# Altium PCB Main.PcbDoc
Units mm, origin at the board's own origin, x right, y up, seen from the top; angles counter-clockwise.
Board outline 35 x 45 mm, 2 copper layers (Top Layer, Bottom Layer), stack 1.135 mm thick; 2 components, 2 nets, 4 pads, 0 vias.
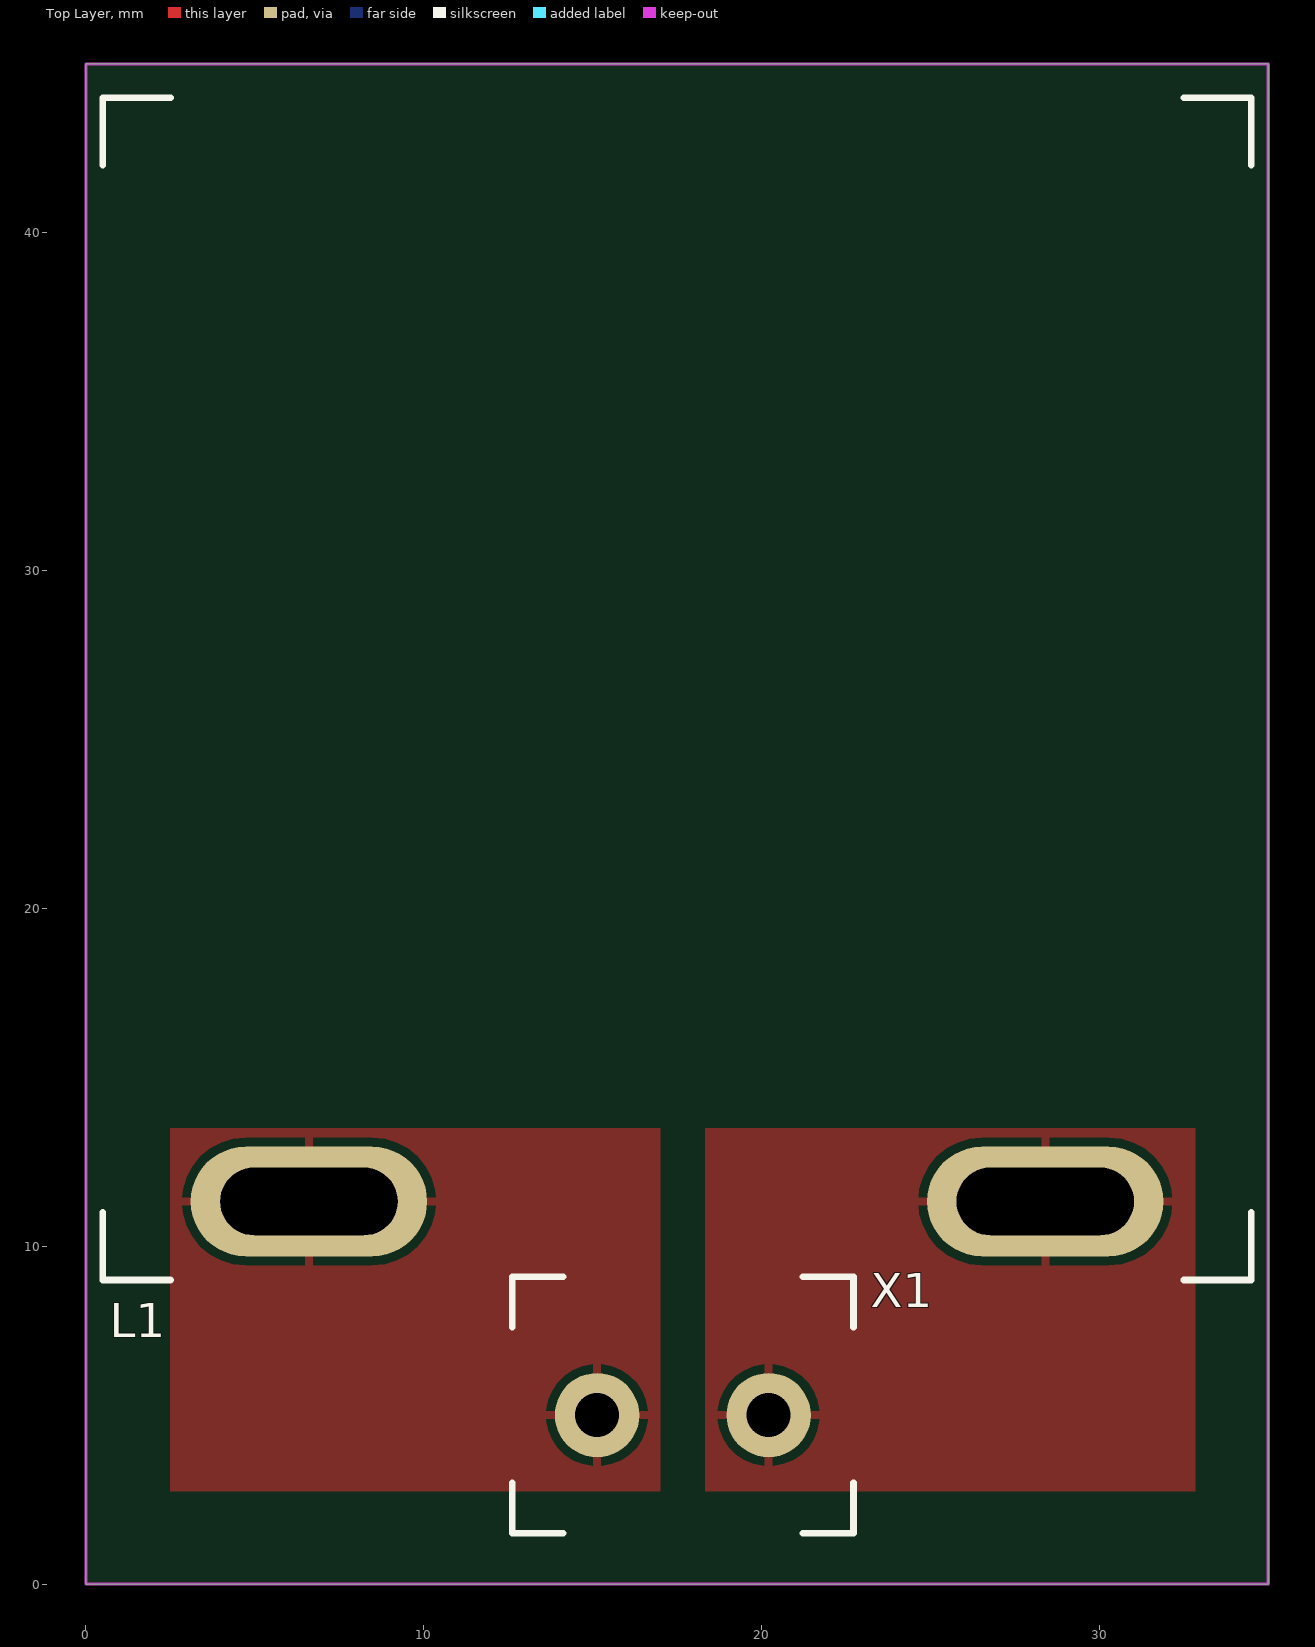
[diagram p0: Top Layer view]
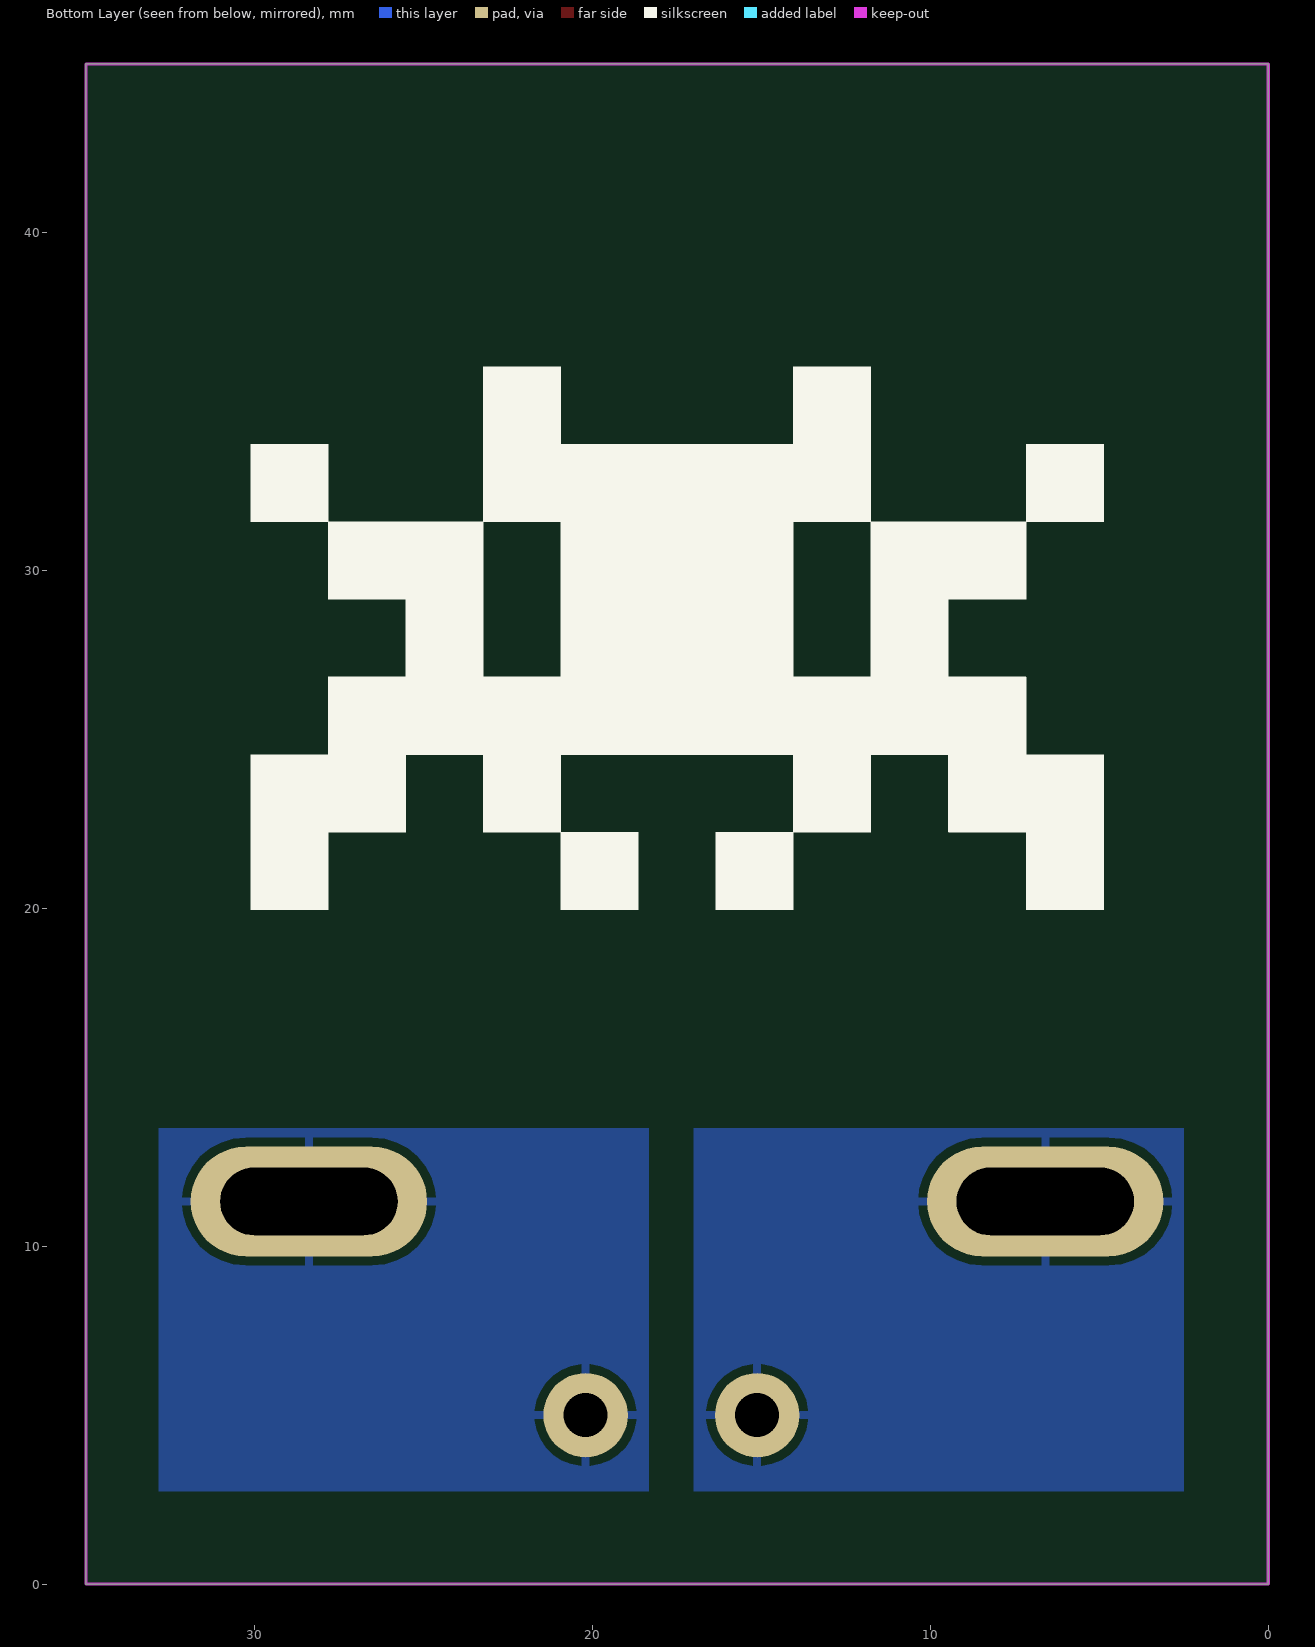
[diagram p1: Bottom Layer view, seen from below]

## Layer stack, top to bottom
Top Solder: solder mask 0.0102, Solder Resist, Dk 3.8
Top Layer: signal copper 0.035
Dielectric 1: dielectric 1.065, FR-4, Dk 4.8
Bottom Layer: signal copper 0.035
Bottom Solder: solder mask 0.0102, Solder Resist, Dk 3.8

## Board outline
0,0 35,0 35,45 0,45

## Design rules (kind name [scope] priority, off if disabled: settings)
BoardOutlineClearance [All] p1: gap=0.2 ignorepadtopadclearanceinfootprint=FALSE
Clearance "inPolygon Clearance" [InPolygon] p1: gap=0.3 ignorepadtopadclearanceinfootprint=TRUE // this rule ensures that every net within a polygon of a different net has a set clearance from the poly
Clearance "Different Diff Pair" [All] p2: gap=0.2 ignorepadtopadclearanceinfootprint=TRUE
Clearance "Same Diff Pair" [All] p3: gap=0.1 ignorepadtopadclearanceinfootprint=TRUE
Clearance "Different Nets" [not InAnyDifferentialPair] p4: gap=0.3 ignorepadtopadclearanceinfootprint=TRUE except(0.1: Arc-SMDPad Arc-THPad Arc-Via Arc-Text Track-SMDPad Track-THPad Track-Via Track-Text SMDPad-Text THPad-Text Via-Text Fill-Text Poly-Text Region-Text Text-Text; 0.12: Arc-Arc Arc-Track Track-Track; 0.15: SMDPad-SMDPad SMDPad-THPad SMDPad-Via THPad-THPad THPad-Via Via-Via; 0.2: Arc-Hole Track-Hole SMDPad-Hole THPad-Hole Via-Hole Fill-Hole Poly-Hole Region-Hole Text-Hole)
Clearance "Same Net" [not InAnyDifferentialPair] p5: gap=0 ignorepadtopadclearanceinfootprint=TRUE except(0.1: THPad-Via; 0.18: Arc-Arc Arc-Track Track-Track)
ComponentClearance [All] p1: gap=0.102 collisioncheckmode=3 verticalgap=0.102 showdistances=TRUE
DiffPairsRouting "Ethernet Routing" [InDifferentialPairClass('Ethernet_Pairs')] p1: maxlimit=0.2 minlimit=0.2 mostfreqgap=0.2 toplayer_minwidth=0.25 toplayer_maxwidth=0.25 toplayer_prefwidth=0.25 bottomlayer_minwidth=0.25 bottomlayer_maxwidth=0.25 bottomlayer_prefwidth=0.25 impedanceprofiledriven=TRUE maxuncoupledlength=12.7
DiffPairsRouting "USB Routing" [InDifferentialPairClass('USB_Pairs')] p2: maxlimit=0.127 minlimit=0.127 mostfreqgap=0.127 toplayer_minwidth=0.23 toplayer_maxwidth=0.23 toplayer_prefwidth=0.23 bottomlayer_minwidth=0.23 bottomlayer_maxwidth=0.23 bottomlayer_prefwidth=0.23 impedanceprofiledriven=TRUE maxuncoupledlength=12.7
DiffPairsRouting "CAN Routing" [InDifferentialPairClass('CAN_Pairs')] p3: maxlimit=0.5 minlimit=0.5 mostfreqgap=0.5 toplayer_minwidth=0.201 toplayer_maxwidth=0.201 toplayer_prefwidth=0.201 bottomlayer_minwidth=0.201 bottomlayer_maxwidth=0.201 bottomlayer_prefwidth=0.201 impedanceprofiledriven=TRUE maxuncoupledlength=12.7
Height [All] p1: minheight=0 maxheight=1816.048 prefheight=12.7
HoleSize [All] p1: absolutevalues=TRUE maxlimit=20 minlimit=0.3 maxpercent=80.000 minpercent=20.000
HoleToHoleClearance [All] p1: gap=0.25 allowstackedmicrovias=FALSE
Length [All] p1: maxlimit=43.432 minlimit=0 usedelayunits=TRUE mindelay=0.000000 maxdelay=10000.000000
MatchedLengths "Diff Pair Matched Delays" [InDifferentialPairClass('Ethernet_Pairs') or InDifferentialPairClass('USB_Pairs') or InDifferentialPairClass('CAN_Pairs')] p1: tolerance=5 checknetsindiffpair=TRUE checkdiffpairvsdiffpair=FALSE checkxsignals=FALSE checkothers=FALSE usedelayunits=TRUE delaytolerance=100.000000
MinimumAnnularRing [All] p1: minimumring=0.2
MinimumSolderMaskSliver [All] p1: minsoldermaskwidth=0
PlaneClearance "Supply Net Clearance" [InNetClass('Supply_Nets')] p1: clearance=0.5
PlaneClearance "All Nets" [All] p2: clearance=0.3
PolygonConnect "Supply Nets" [InNetClass('Supply_Nets')] p1: thpad.connectstyle=Relief thpad.reliefconductorwidth=0.3 thpad.reliefentries=4 thpad.polygonreliefangle="90 Angle" thpad.airgapwidth=0.254 thpad.conductorbypadedge=TRUE thpad.mindistance=0.381 thpad.enablemindistance=FALSE smdpad.connectstyle=Relief smdpad.reliefconductorwidth=0.3 smdpad.reliefentries=4 smdpad.polygonreliefangle="90 Angle" smdpad.airgapwidth=0.254 smdpad.conductorbypadedge=TRUE smdpad.mindistance=0.381 smdpad.enablemindistance=FALSE via.connectstyle=Direct via.reliefconductorwidth=0.3 via.reliefentries=4 via.polygonreliefangle="90 Angle" via.airgapwidth=0.254
PolygonConnect General [All] p2: connectstyle=Relief reliefconductorwidth=0.254 reliefentries=4 polygonreliefangle="90 Angle" airgapwidth=0.254
RoutingVias [All] p1: holewidth=0.2 width=0.35 viastyle="Through Hole" minholewidth=0.15 minwidth=0.3 maxholewidth=6.3 maxwidth=6.55
SilkToSilkClearance [All] p1: silktosilkclearance=0
SilkToSolderMaskClearance [All] p1: minsilkscreentomaskgap=0 clearancetoexposedcopper=TRUE
SolderMaskExpansion [All] p1: expansion=0.075 istentingtop=FALSE
UnRoutedNet [All] p1: checkbadconnections=TRUE
Width "nRF Width" [InNetClass('nRF Signal')] p1: maxlimit=0.379 minlimit=0.379 preferedwidth=0.379 impedanceprofiledriven=TRUE minimp=50.000000 maximp=50.000000 favimp=50.000000 checkconnectedcopper=TRUE
Width [All] p2: maxlimit=100 minlimit=0.1 preferedwidth=0.3
20 further rules are at their usual default settings.

## Components (designator, comment, footprint, x,y, rotation, side; value= is the part's Value field where it differs from the comment)
L1 "[6.8uH] Thru-Hole 47.5A 1.2mOhm" "[6.8uH] Thru-Hole 47.5A 1.2mOhm" 17.5,29 r0 top
X1 "2pin Screw Terminal" "[Screw Terminal] 2pin 5mm" 17.63,5 r0 top

## Footprints (in the part's own frame and the unit in brackets; to place one, negate y for a bottom-side part, rotate by r counter-clockwise, add the part's x,y. Pads: shape width x height; smd on the part's side, far side on the other; paste and mask are expansions set on the pad)
"[6.8uH] Thru-Hole 47.5A 1.2mOhm" [mm]
  oval 7x3.25 hole 2 slot 5.25 at 0 deg: 1(-10.9,-17.675) 2(10.9,-17.675)
  silkscreen extent -17,-20 17,15, body extent -16.5,-18.35 16.5,14.65, height 15.5
"[Screw Terminal] 2pin 5mm" [mm]
  round 2.5 hole 1.3: 1(-2.5,0) 2(2.58,0)
  silkscreen extent -5.01,-3.5 5.09,4.1, body extent -5.45,-3.5 5.05,4.1, height 9.99

## Part data
L1: "B82559A5682A033", Inductance=6.8uH, Package=Thru-Hole, Supplier Part Number 1=495-B82559A5682A033-ND, Supplier 1=DigiKey
X1: library part "[Screw Terminal] 2pin", "TB002-500-02BE", Supplier Part Number 1=102-6145-ND, Supplier 1=DigiKey

## Nets (pads, with @x,y where several pads share a name; then routed paths per layer and width w, separated by ;. In a path a pad name is that pad's centre, name@x,y a point inside that pad or via, vN(x,y) a via of type N, cw(c..) or ccw(c..) an arc to the next point about the centre after c; other vN are vias at no path point)
NetL1_1: L1.1 X1.1
NetL1_2: L1.2 X1.2

## Polygon pours and split planes (outlines as drawn)
NetL1_2 on Top Layer "NONET_L01_P-001" (solid, remove dead copper, pour order 3): 18.34,2.75 18.34,13.5 32.84,13.5 32.84,2.75
NetL1_1 on Top Layer "NONET_L01_P-001" (solid, remove dead copper, pour order 0): 17,2.75 17,13.5 2.5,13.5 2.5,2.75
NetL1_2 on Bottom Layer "NONET_L01_P-001" (solid, remove dead copper, pour order 1): 18.34,2.75 18.34,13.5 32.84,13.5 32.84,2.75
NetL1_1 on Bottom Layer "NONET_L01_P-001" (solid, remove dead copper, pour order 2): 17,2.75 17,13.5 2.5,13.5 2.5,2.75

## Keep-outs
Keep-Out Layer:
  the board outline again, w0.1

## Silkscreen, mask and mechanical layers (free items; w line width, h text height)
Bottom Overlay:
  region: 14.915,19.966 14.057,19.966 14.057,22.261 16.349,22.261 16.349,22.259 16.352,22.259 16.352,19.966 14.918,19.966
  region: 4.875,33.095 4.875,33.739 7.168,33.739 7.168,33.736 7.17,33.736 7.17,31.443 4.875,31.443 4.875,33.092
  region: 27.83,32.15 27.83,33.736 27.832,33.736 27.832,33.739 30.125,33.739 30.125,31.443 27.83,31.443 27.83,32.148
  region: 20.943,22.079 20.943,19.966 18.648,19.966 18.648,22.259 18.651,22.259 18.651,22.261 20.943,22.261 20.943,22.082
  region: 11.802,36.034 14.057,36.034 14.057,33.739 20.943,33.739 20.943,36.034 23.239,36.034 23.239,31.443 20.943,31.443 20.943,26.852 23.239,26.852 23.239,31.443 27.83,31.443 27.83,29.151 27.827,29.151 27.827,29.148 25.534,29.148 25.534,26.852 27.827,26.852 27.827,26.849 27.83,26.849 27.83,24.557 30.125,24.557 30.125,19.966 27.83,19.966 27.83,22.261 25.537,22.261 25.537,22.264 25.534,22.264 25.534,24.557 23.239,24.557 23.239,22.264 23.236,22.264 23.236,22.261 20.943,22.261 20.943,24.557 14.057,24.557 14.057,22.261 11.764,22.261 11.764,22.264 11.761,22.264 11.761,24.557 9.466,24.557 9.466,22.264 9.463,22.264 9.463,22.261 7.17,22.261 7.17,19.966 4.875,19.966 4.875,24.557 7.17,24.557 7.17,26.849 7.173,26.849 7.173,26.852 9.466,26.852 9.466,29.148 7.173,29.148 7.173,29.151 7.17,29.151 7.17,31.443 11.761,31.443 11.761,26.852 14.057,26.852 14.057,31.443 11.761,31.443 11.761,36.034 11.799,36.034